# Altium PCB ECE453_Custom.PcbDoc
Units mil, origin at the board's own origin, x right, y up, seen from the top; angles counter-clockwise.
Board outline 2347.18 x 3917.24 mil, 2 copper layers (Top Layer, Bottom Layer); 13 components, 8 nets, 43 pads, 9 vias.
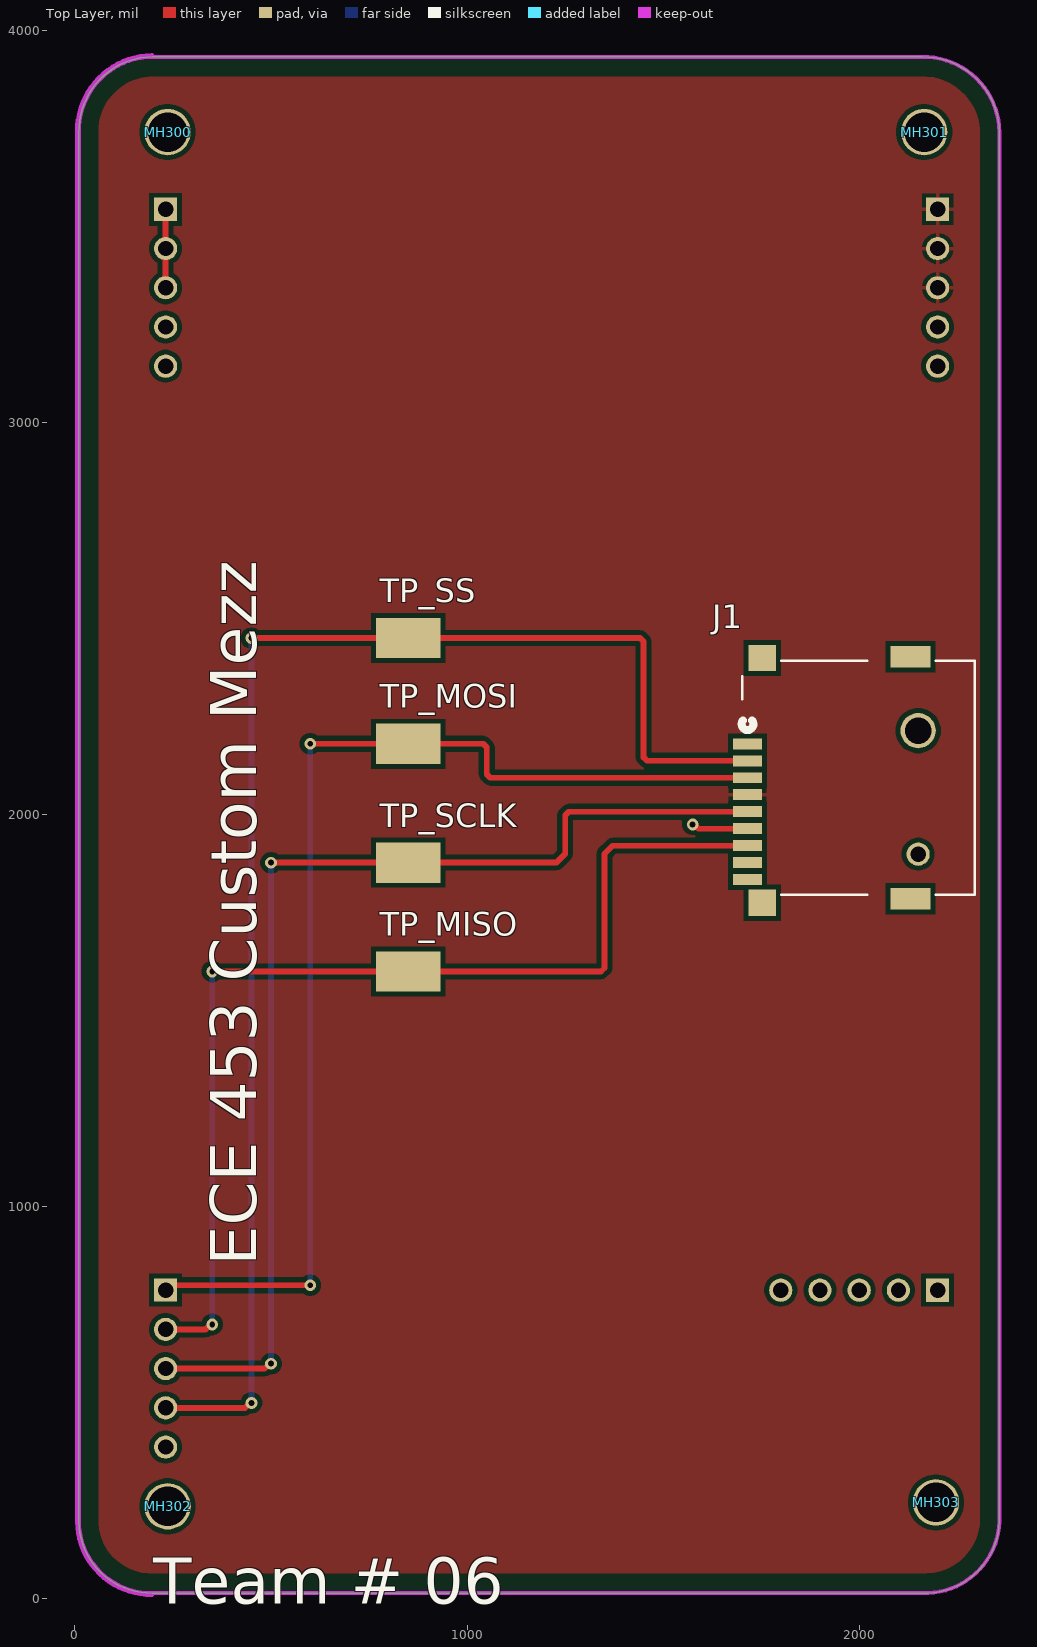
[diagram p0: Top Layer view]
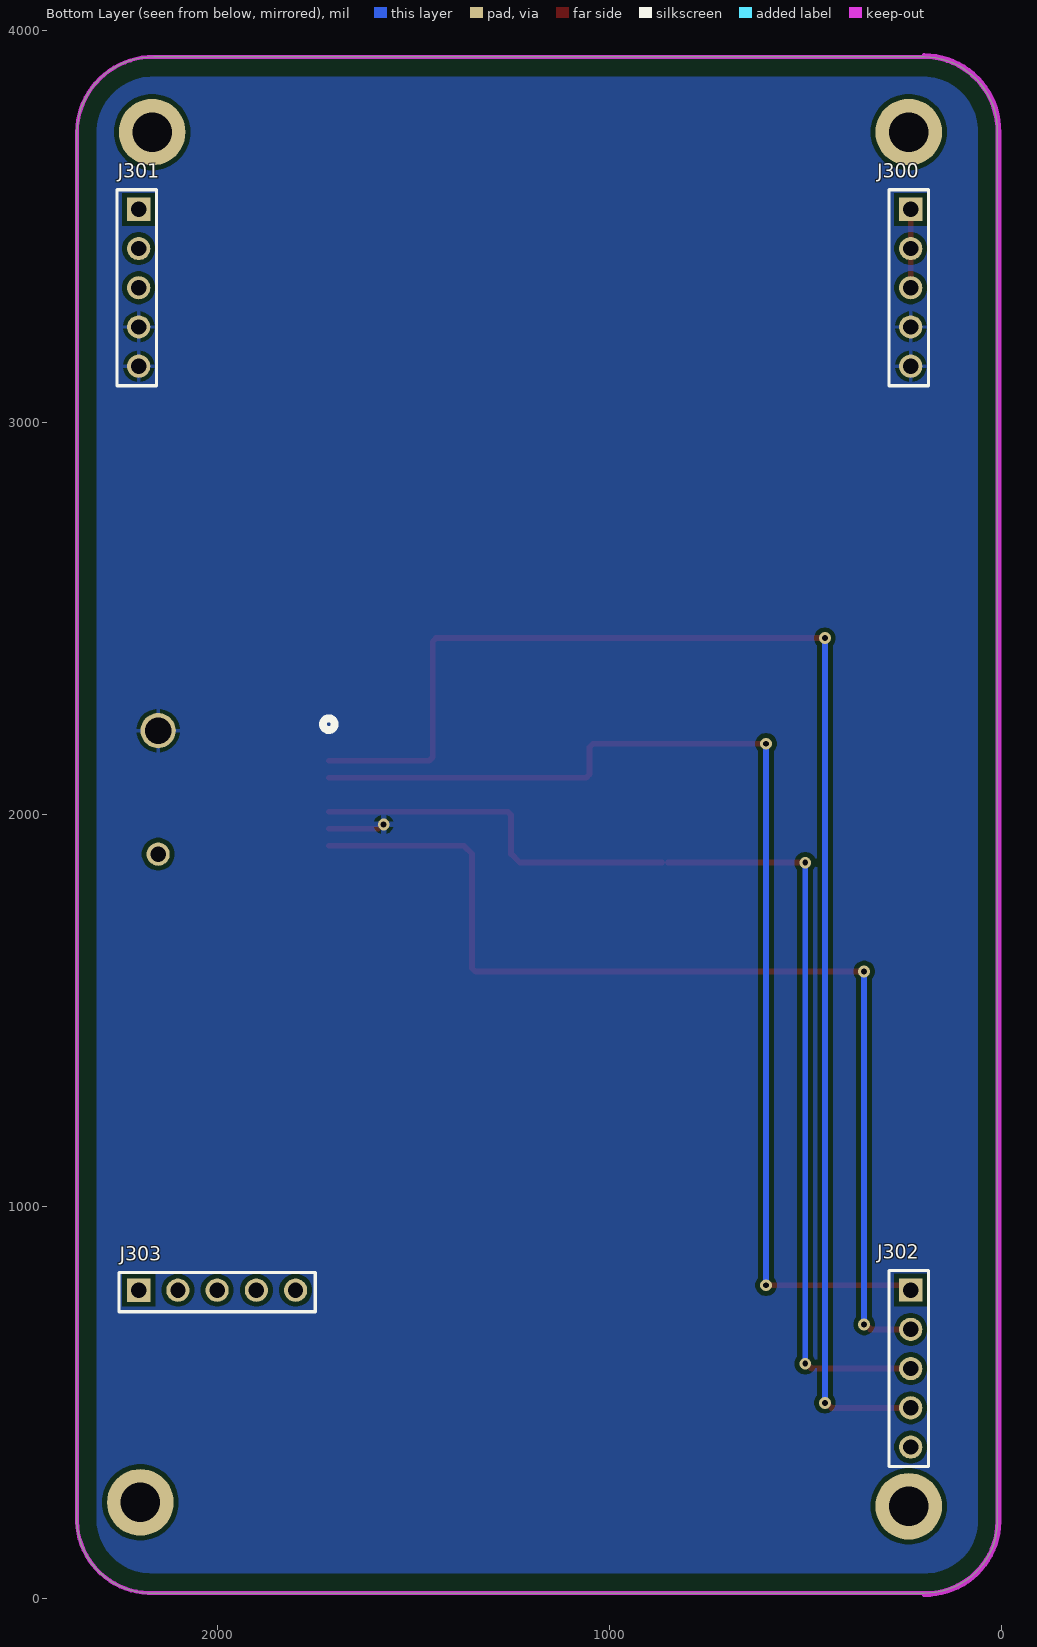
[diagram p1: Bottom Layer view, seen from below]
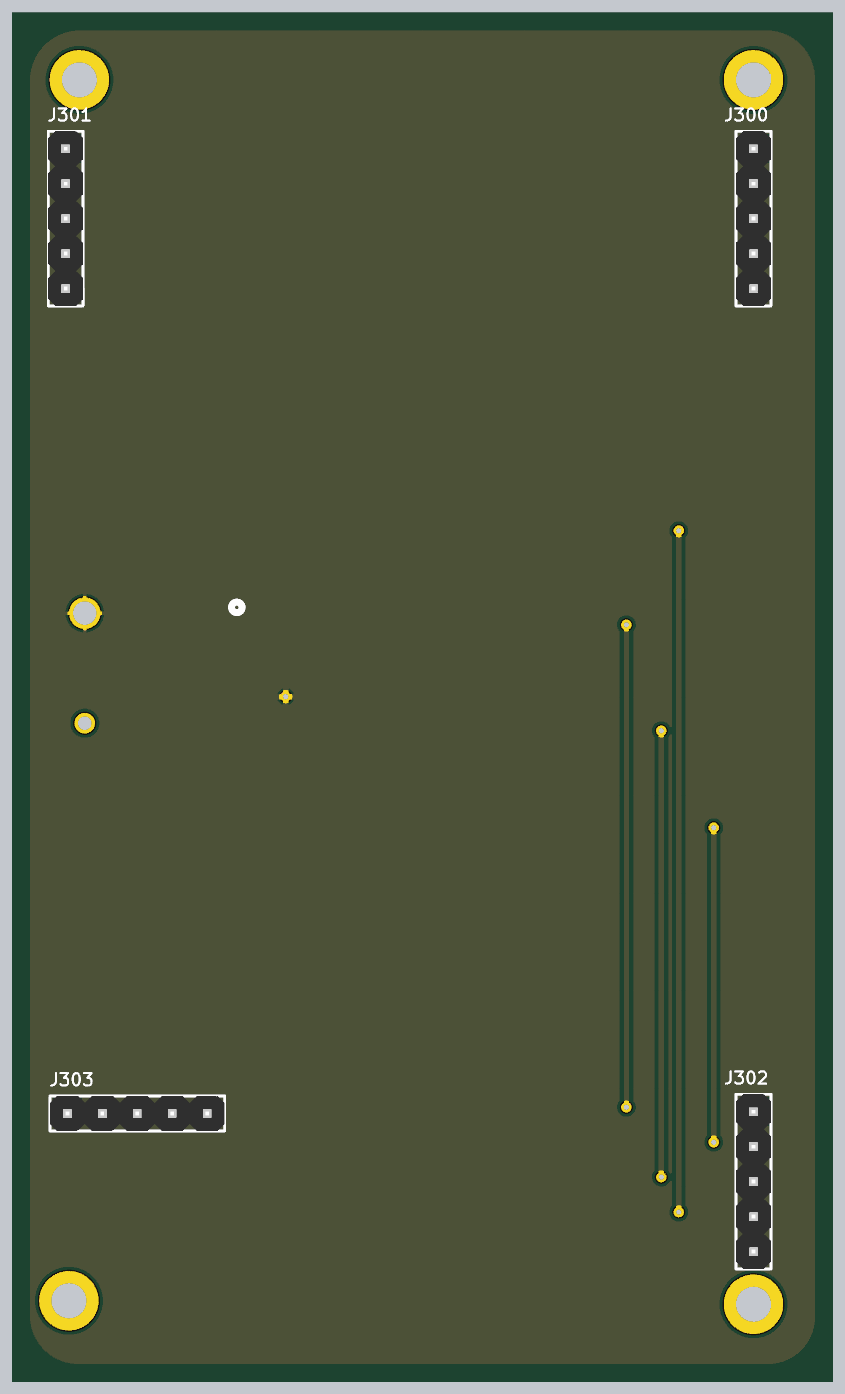
[diagram p2: 3D render of the assembled board from below, using the file's embedded part models]

## Layer stack, top to bottom
Top Solder: solder mask 0.4, Solder Resist, Dk 3.5
Top Layer: signal copper 1.4
Dielectric1: dielectric 12.6, FR-4, Dk 4.8
Bottom Layer: signal copper 1.4
Bottom Solder: solder mask 0.4, Solder Resist, Dk 3.5

## Board outline
10.01,196.88 ccw(c194.35,199.35) 196.78,15.01 cw(c196.85,10) 196.85,15.02 2160.35,15.02 cw(c2160.35,10) 2160.58,15.01 ccw(c2167.85,204.35) 2357.19,196.95 2357.19,3740.13 ccw(c2162.85,3737.66) 2160.45,3931.99 ccw(c2162.85,3737.66) 2160.42,3931.99 2160.45,3931.99 cw(c2160.35,3937.01) 2160.35,3931.99 200,3931.99 cw(c200,3937.01) 198.43,3932.25 cw(c196.85,3937.01) 196.91,3931.99 ccw(c199.35,3742.66) 10.01,3740.25 ccw(c199.35,3742.66) 10.01,3740.22 10.01,3740.25 cw(c5,3740.16) 10.01,3740.16 10.01,196.88 cw(c194.35,199.35)

## Design rules (kind name [scope] priority, off if disabled: settings)
BoardOutlineClearance [All] p1: gap=50 ignorepadtopadclearanceinfootprint=FALSE
Clearance Polygon_Clearance [All vs InPolygon] p1: gap=12 ignorepadtopadclearanceinfootprint=TRUE
Clearance [All] p2: gap=7 ignorepadtopadclearanceinfootprint=TRUE
ComponentClearance [InComponent('U3')] p1: gap=0 collisioncheckmode=3 verticalgap=10 showdistances=FALSE
Height [All] p1: minheight=0 maxheight=866.14 prefheight=500
HoleSize [All] p1: absolutevalues=TRUE maxlimit=250 minlimit=15 maxpercent=80.000 minpercent=20.000
MinimumAnnularRing [All] p1: minimumring=7
MinimumSolderMaskSliver [All] p1: minsoldermaskwidth=1
NetAntennae NetAntennae_5.0V [InNet('5.0V')] p1: netantennaetolerance=0
NetAntennae NetAntennae_3.3V [InNet('3.3V')] p2: netantennaetolerance=0
PolygonConnect [IsNamedPolygon('5.0V_L01_P019') or IsNamedPolygon('3.3V_L01_P020') vs IsVia] p1: connectstyle=Relief reliefconductorwidth=10 reliefentries=4 polygonreliefangle="90 Angle" airgapwidth=10
PolygonConnect PolygonConnect_2 [All vs IsVia] p2: connectstyle=Relief reliefconductorwidth=15 reliefentries=4 polygonreliefangle="90 Angle" airgapwidth=10
PolygonConnect PolygonConnect_1 [All] p3: connectstyle=Relief reliefconductorwidth=10 reliefentries=4 polygonreliefangle="90 Angle" airgapwidth=10
RoutingVias [All] p1: holewidth=15 width=30 viastyle="Through Hole" minholewidth=15 minwidth=30 maxholewidth=28 maxwidth=50
SilkToSilkClearance [All] p1: silktosilkclearance=1
SilkToSolderMaskClearance [IsPad] p1: minsilkscreentomaskgap=1 clearancetoexposedcopper=TRUE
SolderMaskExpansion [All] p1: expansion=4 istentingtop=FALSE
UnRoutedNet [All] p1: checkbadconnections=TRUE
Width [All] p1: maxlimit=472.44 minlimit=7 preferedwidth=15 minimp=50.000000 maximp=50.000000 favimp=50.000000
22 further rules are at their usual default settings.

## Components (designator, comment, footprint, x,y, rotation, side; value= is the part's Value field where it differs from the comment)
J1 "693071020811" CONN9_020811_WRE 1714.88,2180.54 r90 top
J300 "CONN_HEADER_MALE_1x5" HDR1X5 236.22,3543.31 r270 bottom
J301 "CONN_HEADER_MALE_1x5" HDR1X5 2204.72,3543.31 r270 bottom
J302 "CONN_HEADER_MALE_1x5" HDR1X5 236.22,787.4 r270 bottom
J303 "CONN_HEADER_MALE_1x5" HDR1X5 2199.61,782.28 r180 bottom
MH300 "MHOLE_2_55MM" MHOLE_2_55MM#1 236.22,3740.16 r90 top locked
MH301 "MHOLE_2_55MM" MHOLE_2_55MM#1 2165.35,3740.16 r90 top locked
MH302 "MHOLE_2_55MM" MHOLE_2_55MM#1 236.22,236.22 r90 top locked
MH303 "MHOLE_2_55MM" MHOLE_2_55MM#2 2165.35,236.22 r0 top locked
TP_MISO "TP_1206" TP-SMC-1206 850,1600 r180 top (schematic designator TP_MISO1)
TP_MOSI "TP_1206" TP-SMC-1206 850,2180.54 r180 top (schematic designator TP_MOSI1)
TP_SCLK "TP_1206" TP-SMC-1206 850,1877.39 r180 top (schematic designator TP_SCLK1)
TP_SS "TP_1206" TP-SMC-1206 850,2450 r180 top (schematic designator TP_SS1)

## Footprints (in the part's own frame and the unit in brackets; to place one, negate y for a bottom-side part, rotate by r counter-clockwise, add the part's x,y. Pads: shape width x height; smd on the part's side, far side on the other; paste and mask are expansions set on the pad)
CONN9_020811_WRE [mil]
  rect 28x75 smd paste+0 mask+0: 1(0,0) 2(-43.31,0) 3(-86.61,0) 4(-129.92,0) 5(-173.23,0) 6(-216.54,0) 7(-259.84,0) 8(-303.15,0) 9(-346.46,0)
  rect 67x71 smd: 10(-405.51,-37.48) 11(218.5,-37.48)
  rect 55x102 smd: 12(-395.67,-415.43) 13(222.44,-415.43)
  round 59 hole 39: 14(-281.5,-435.12)
  round 90 hole 66.93: 15(33.47,-435.12)
  silkscreen extent -385,-579 212,15, body extent 0,0 10,10, height 10
HDR1X5 [mil] "Connector; Header; 5 Position"
  rect 59.06x59.06 hole 39: 1(0,5)
  round 59.06 hole 39: 2(100,5) 3(200,5) 4(300,5) 5(400,5)
  silkscreen extent -50,-50 450,50, body extent -50,-50 450,50, height 330
MHOLE_2_55MM#1 [mm] "2.55MM Mounting Hole"
  round 3 / inner round 4.572 / far side round 4.318 hole 2.55: 1(0,0)
MHOLE_2_55MM#2 [mm]
  round 3 / inner round 4.572 / far side round 4.318 hole 2.55: 1(0.762,0.254)
TP-SMC-1206 [mm]
  rect 4.2x2.6 smd mask+0: 1(0,0)
  body extent -1.57,-0.79 1.63,0.81, height 1.22

## Part data
J1: "No Description Available", Mfr_Name="Wurth Electronics", Copyright="Copyright (C) 2022 Ultra Librarian. All rights reserved.", Digi-Key_Part_Number_1=732-693071020811TR-ND, Digi-Key_Part_Number_2=732-693071020811CT-ND, Digi-Key_Part_Number_3=732-693071020811DKR-ND, Manufacturer_Part_Number=693071020811, RefDes=RefDes, Type=DEV
J300 J301 J302 J303: "Header, 5-Pin", Color=Black, Manufacturer 1=Sullins, Manufacturer Part Number 1=PREC005SACN-RC, Package Quantity=1, Supplier Part Number 1=S1032EC-05-ND, ComponentLink1Description=http://www.farnell.com/cad/1737268.pdf, ComponentLink1URL=http://www.farnell.com/cad/1737268.pdf, ComponentLink2Description=http://katalog.we-online.de/em/datasheet/6130xx11121.pdf, ComponentLink2URL=http://katalog.we-online.de/em/datasheet/6130xx11121.pdf, ComponentLink3Description=https://datasheet.ciiva.com/741/xrxczzzsxxn-rc-st-11635-b-741840.pdf?src-supplier=Digi-Key, ComponentLink3URL=https://datasheet.ciiva.com/741/xrxczzzsxxn-rc-st-11635-b-741840.pdf?src-supplier=Digi-Key, Connector Type="Male Pin", Contact Mating Length=0.23inch, Contact Plating=Tin, Mount="Through Hole", Number of Positions=5, Number of Rows=1, Packaging=Bulk, Pitch=0.1inch, Pricing 1="1=0.19000, 10=0.17400, 25=0.12960, 50=0.11120, 100=0.10740, 250=0.09264, 500=0.08892 (USD)", RoHS=Yes, Stock 1=0, Supplier 1=Digi-Key, Termination=Solder
MH300 MH301 MH302 MH303: "Mounting Holde", Manufacturer Part Number="UW MTHOLE"
TP_MISO TP_MOSI TP_SCLK TP_SS: "Test Point SMD 1206", Case Size=1206, Manufacturer="TE Connectivity (Tyco Electronics)", Manufacturer Part Number=1625854-1, Operating Temperature="-55 to 125 C", Power Rating=N/R, Resistance Value="0 Ohm", Supplier Part Number=A106143CT-ND, ComponentLink1Description=https://datasheet.ciiva.com/6439/eng-ds-1773266-a-6439169.pdf, ComponentLink1URL=https://datasheet.ciiva.com/6439/eng-ds-1773266-a-6439169.pdf, ComponentLink2Description=https://datasheet.ciiva.com/30136/1773266-a-30136341.pdf, ComponentLink2URL=https://datasheet.ciiva.com/30136/1773266-a-30136341.pdf, ComponentLink3Description=https://datasheet.ciiva.com/6439/eng-ds-1773266-a-6439080.pdf, ComponentLink3URL=https://datasheet.ciiva.com/6439/eng-ds-1773266-a-6439080.pdf, ComponentLink4Description=https://datasheet.ciiva.com/6439/eng-ds-1773266-a-6439081.pdf, ComponentLink4URL=https://datasheet.ciiva.com/6439/eng-ds-1773266-a-6439081.pdf, ComponentLink5Description=https://datasheet.ciiva.com/6439/eng-ds-1773266-a-6439083.pdf, ComponentLink5URL=https://datasheet.ciiva.com/6439/eng-ds-1773266-a-6439083.pdf, Dimension="3.2 x 1.6 x 1.25mm", Family=RC, Mounting="Surface Mount", Packaging="Tape and Reel", Part No=1625854-1, Pricing 1="1=0.28, 10=0.261, 25=0.224, 50=0.1902, 100=0.1828, 250=0.1641, 500=0.1567, 1000=0.1306 (USD)", RoHS=Yes, Stock 1=31937, Supplier=Digi-Key, Temperature Coefficient=N/R, Terminal Pitch=N/R, Termination Style=N/R, Tolerance=N/R

## Via types
v1: diameter 30, hole 15, Top Layer to Bottom Layer, 9 vias

## Nets (pads, with @x,y where several pads share a name; then routed paths per layer and width w, separated by ;. In a path a pad name is that pad's centre, name@x,y a point inside that pad or via, vN(x,y) a via of type N, cw(c..) or ccw(c..) an arc to the next point about the centre after c; other vN are vias at no path point)
3.3V: J1.4 J301.1 J301.2 J301.3
5.0V: J300.1 J300.2 J300.3 | length 200
  Top Layer w15: J300.3 J300.2 J300.1
GND: J1.6 J1.15 J300.4 J300.5 J301.4 J301.5 | length 150.9
  Top Layer w15: v1(1575,1975) 1579.06,1975 1590.06,1964 J1.6 ; J1.15@2150,2200 J1.15@2154.59,2204.59
MISO: J1.7 J302.2 TP_MISO.1 | length 2692.3
  Top Layer w15: J302.2 333.34,687.4 345.94,700 v1(350,700) ; v1(350,1600) TP_MISO.1 1341.21,1600 1350,1608.79 1350,1900 1370.69,1920.69 J1.7
  Bottom Layer w15: v1(350,700) v1(350,1600)
MOSI: J1.3 J302.1 TP_MOSI.1 | length 2945.7
  Top Layer w15: J302.1 243.82,800 v1(600,800) ; v1(600,2180.54) TP_MOSI.1 1041.21,2180.54 1050,2171.75 1050,2102.71 1058.79,2093.92 J1.3
  Bottom Layer w15: v1(600,800) v1(600,2180.54)
SCLK: J1.5 J302.3 TP_SCLK.1 | length 2862
  Top Layer w15: J302.3 483.34,587.4 495.94,600 v1(500,600) ; v1(500,1877.39) TP_SCLK.1 ; TP_SCLK.1@865.75,1877.39 1227.39,1877.39 1250,1900 1250,1998.52 1258.79,2007.31 J1.5
  Bottom Layer w15: v1(500,600) v1(500,1877.39)
SS0: J1.2 J302.4 TP_SS.1 | length 3741.4
  Top Layer w15: J302.4 433.34,487.4 445.94,500 v1(450,500) ; v1(450,2450) TP_SS.1 1441.21,2450 1450,2441.21 1450,2146.02 1458.79,2137.23 J1.2
  Bottom Layer w15: v1(450,500) v1(450,2450)
XRES_N: J302.5
pads on no net: J1.1 J1.8 J1.9 J1.10 J1.11 J1.12 J1.13 J1.14 J303.1 J303.2 J303.3 J303.4 J303.5 MH300.1 MH301.1 MH302.1 MH303.1

## Polygon pours and split planes (outlines as drawn)
GND on Bottom Layer "GND_L02_P000" (solid, pour order 0): 0,3950 2400,3950 2400,0 2350,-50 0,-50
3.3V on Top Layer "3.3V_L01_P001" (solid, remove dead copper, pour order 1): 0,3950 2400,3950 2400,0 0,0

## Keep-outs
Keep-Out Layer:
  lines w10: 10.01,196.92 ccw(c194.35,199.35) 10.01,196.88 ; 5,196.85 ccw(c194.35,199.35) 196.85,10 cw(c194.35,199.35) 5,196.85 ; 5,196.85 5,3740.16 ; 5,196.85 5,3740.16 ; 5,3740.16 cw(c199.35,3742.66) 196.85,3937.01 ; 5,3740.16 cw(c199.35,3742.66) 196.85,3937.01 ; 10.01,196.88 ccw(c194.35,199.35) 196.78,15.01 cw(c196.85,10) 196.85,15.02 2160.35,15.02 cw(c2160.35,10) 2160.58,15.01 ccw(c2167.85,204.35) 2357.19,196.95 2357.19,3740.13 ccw(c2162.85,3737.66) 2160.45,3931.99 ; 10.01,196.88 10.01,3740.16 ccw(c5,3740.16) 10.01,3740.25 ; 10.01,3740.25 ccw(c199.35,3742.66) 10.01,3740.22 10.01,3740.25 ; 10.01,3740.25 cw(c199.35,3742.66) 196.91,3931.99 ccw(c196.85,3937.01) 198.43,3932.25 ccw(c200,3937.01) 200,3931.99 2160.35,3931.99 ccw(c2160.35,3937.01) 2160.45,3931.99 ; 196.85,3937.01 196.85,3937.01 ; 196.85,3937.01 196.85,3937.01 ; 2160.45,3931.99 ccw(c2162.85,3737.66) 2160.42,3931.99 ; 2160.42,3931.99 2160.45,3931.99

## Silkscreen, mask and mechanical layers (free items; w line width, h text height)
Top Overlay:
  text "ECE 453 Custom Mezz" at 500,850 h200 r90
  text "Team # 06" at 200,-50 h200
Mechanical 2:
  lines w10: 196.85,3937.01 ccw(c199.35,3742.66) 5,3740.16 5,196.85 ccw(c194.35,199.35) 196.85,10 ; 200,3937.01 2160.35,3937.01 cw(c2162.85,3737.66) 2362.2,3740.16 2362.2,196.85 cw(c2167.85,204.35) 2160.35,10 196.85,10 ; 196.85,10 196.85,10

## Dimensions
1799.61,787.28 to 231.22,787.4 on Mechanical 5
2199.72,3543.31 to 2199.61,787.28 on Mechanical 5
231.22,3543.31 to 231.22,787.4 on Mechanical 5
231.22,3543.31 to 2199.72,3543.31 on Mechanical 5